# Altium PCB SiLPA_HE.PcbDoc (part 10 of 10)
Units mm, origin at the board's own origin, x right, y up, seen from the top; angles counter-clockwise.
Board outline 222.47 x 100.01 mm, 4 copper layers (Top Layer, Int1 (GND), Int2 (PWR), Bottom Layer), stack 1.508 mm thick; 661 components, 355 nets, 1925 pads, 1744 vias.
Unrouted connection lines stored in the file: 360.
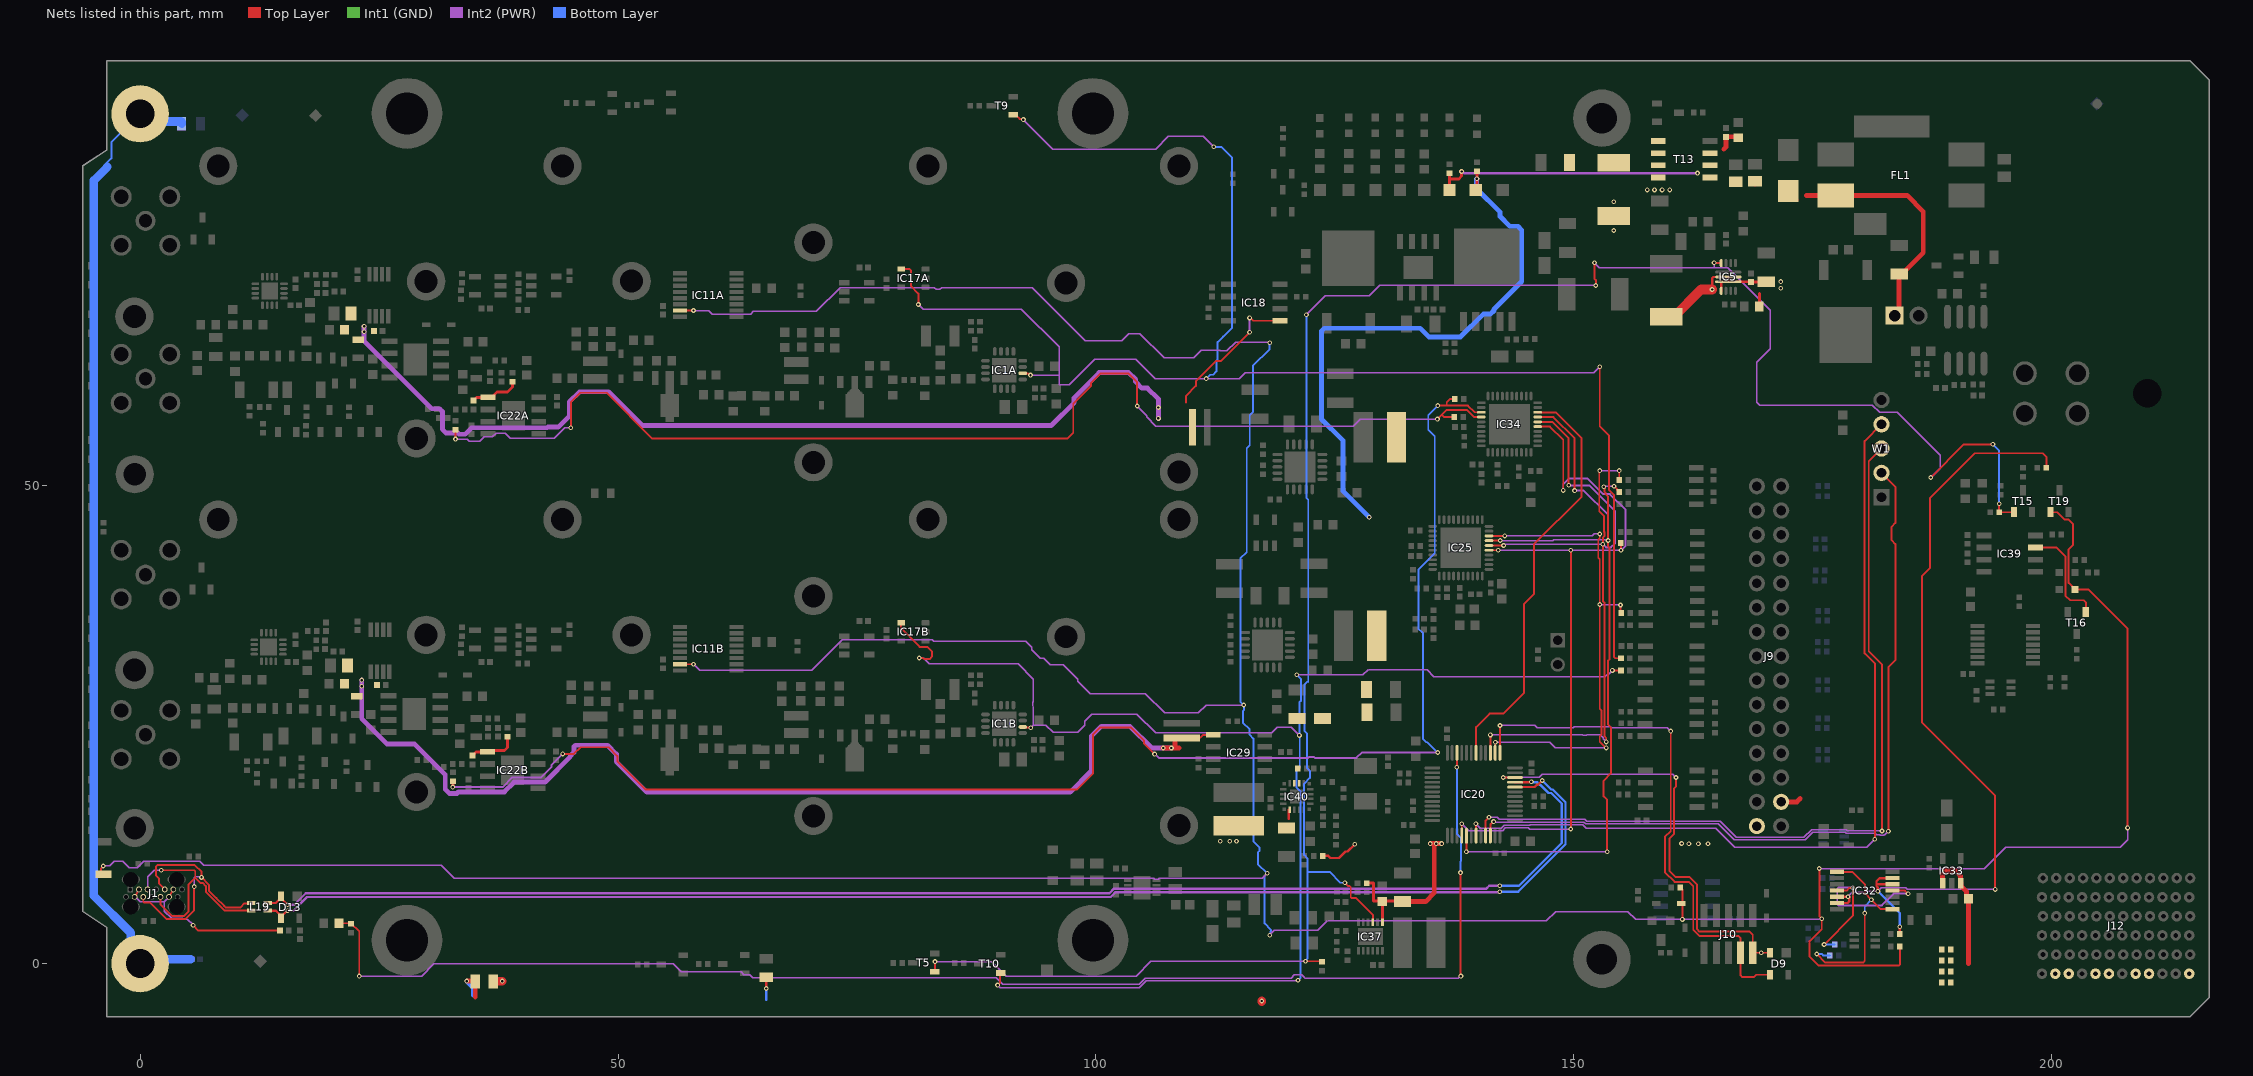
[diagram p9: the nets of this part, all layers, seen from the top]

## Via types
v1: diameter 0.5, hole 0.25, Top Layer to Bottom Layer, tented both sides, 1439 vias
v2: diameter 0.5, hole 0.25, Top Layer to Bottom Layer, tented bottom, 291 vias
v3: diameter 0.5, hole 0.25, Top Layer to Bottom Layer, 12 vias
v4: diameter 0.5, hole 0.25, Top Layer to Bottom Layer, tented top, 2 vias

## Nets (pads, with @x,y where several pads share a name; then routed paths per layer and width w, separated by ;. In a path a pad name is that pad's centre, name@x,y a point inside that pad or via, vN(x,y) a via of type N, cw(c..) or ccw(c..) an arc to the next point about the centre after c; other vN are vias at no path point) (continued)
P12V0: C21.2 C22.2 C99.2 C114.2 D4.1 FL1.2 J9.28 J9.29 J11.1 R41.1 R48.1 R49.1 R50.1 R51.2 R218.1 T13.1 T13.2 T13.3 TP18.1 | length 62.2
  Top Layer w0.3: TP18.1@136.977,80.943 136.977,82.095 ; R218.1@136.977,82.673 136.977,82.095 ; v1(138.252,82.868) 138.252,82.385 137.961,82.095 136.977,82.095
  Top Layer w0.508: v1@138.227,82.868 v1(138.252,82.868) ; 165.677,85.193 165.927,85.443 C99.2@165.927,86.493 166.877,86.493 R51.2@166.927,86.443 ; C22.2@166.927,81.793 C22.2@167.177,81.543 ; C21.2@168.927,81.543 C21.2@168.927,81.843 ; D4.1@171.606,81.331 172.396,80.541 172.396,80.059 D4.1@173.177,80.059 ; J9.28@172.074,16.921 173.33,16.921 173.677,17.268 ; D4.1@172.427,80.809 D4.1@173.177,80.059 ; D4.1@173.248,79.913 173.177,79.984 D4.1@173.177,80.059 ; 174.34,80.359 FL1.2@176.818,80.359 ; FL1.2@176.518,80.059 FL1.2@176.727,80.268 ; FL1.2@177.052,80.268 FL1.2@176.727,80.268 ; J11.1@183.702,67.893 184.027,68.218 C114.2@184.027,72.118 ; C114.2@184.402,72.168 184.673,72.439 184.673,72.489 186.552,74.368 186.552,78.668 184.861,80.359 FL1.2@177.377,80.359 FL1.2@176.818,80.359 ; FL1.2@176.727,80.268 FL1.2@176.818,80.359
  Int2 (PWR) w0.245: v1(138.252,82.868) 138.321,82.868 138.496,82.693 v1(162.927,82.693)
P12V0_DIOT: C101.2 IC33.1 IC33.3 J12.A1 J12.D1 J12.E1 J12.G1 J12.H1 J12.J1 J12.K1 R41.2 R48.2 R49.2 R50.2 | length 12.5
  Top Layer w0.508: IC33.1@188.577,8.393 188.577,9.395 188.875,9.693 189.927,9.693 190.177,9.443 190.427,9.193 IC33.3@190.427,8.443 ; IC33.3@190.477,8.393 190.477,8.143 191.056,7.564 191.056,7.039 191.152,6.943 C101.2@191.177,6.943 ; 191.277,-0.007 C101.2@191.277,6.793
P12V0_SW: C37.2 C123.2 C124.2 C141.2 IC37.1 IC40.13 L8.1 L21.1 R104.1 R159.1 T13.5 T13.6 T13.7 T13.8 | length 23.7
  Top Layer w0.245: L21.1@114.84,14.441 L21.1@114.985,14.297 ; 120.164,15.159 IC40.13@120.164,16.104
  Top Layer w0.254: R159.1@123.644,11.269 124.302,11.269 124.53,11.041 125.409,11.041 126.091,11.723 126.317,11.723 v1(127.066,12.472)
  Top Layer w0.3: R104.1@128.315,8.364 128.24,8.438 129.024,8.438 129.024,6.538 C124.2@129.874,6.538 ; C124.2@129.584,6.829 C124.2@129.874,6.538 ; IC37.1@129.961,4.329 C124.2@129.961,6.513 ; C123.2@131.967,6.538 C124.2@129.874,6.538
  Top Layer w0.5: C123.2@132.053,6.486 134.487,6.486 135.388,7.387 v1@135.388,12.549 ; v1(134.962,12.549) v1(135.6,12.549) v1(136.161,12.549)
  other v1: 162.027,12.543 163.027,12.543 164.027,12.543 161.263,12.557 112.99,12.807 113.987,12.807 114.698,12.807 157.677,80.938 158.427,80.943 159.227,80.943 160.027,80.943
P12V0F: C38.2 C95.2 IC5.1 IC5.8 L8.2 R17.2 | length 6.3
  Top Layer w0.245: L8.2@154.152,78.193 L8.2@154.177,78.218 ; IC5.8@165.406,70.383 165.406,71.172 IC5.1@165.427,71.193
  Top Layer w0.3: IC5.1@166.156,71.333 168.487,71.333 C95.2@168.527,71.293 C95.2@168.567,71.333 ; C95.2@168.627,71.293 170.078,71.293 C38.2@170.116,71.33 C38.2@169.995,71.21 ; R17.2@169.405,68.743 169.405,70.102
  other v1: 171.627,70.643 171.627,71.343 154.177,76.693 154.177,79.693
P25V0_0: C46A.2 C47A.2 C48A.2 IC18.1 L12A.2 R173.2 | length 115.5
  Top Layer w0.2: 109.427,58.683 109.427,59.398 110.46,60.431 110.46,60.935 112.554,63.029 113.058,63.029 v1(116.075,66.046) ; v1(116.075,67.551) 116.156,67.551 116.458,67.249 IC18.1@119.252,67.249
  Top Layer w0.245: C46A.2@21.179,66.334 C46A.2@21.32,66.475 ; L12A.2@22.983,65.367 L12A.2@23.089,65.261
  Top Layer w0.3: C46A.2@21.179,66.334 C46A.2@21.198,66.314
  Int2 (PWR) w0.2: v1(116.075,66.046) v1(116.075,67.551)
  Int2 (PWR) w0.5: v1(23.433,66.685) v1(23.433,66.093) 23.433,65.11 30.5,58.042 31.329,58.042 31.621,57.749 31.621,55.891 32.015,55.497 33.249,55.497 33.365,55.382 34,55.382 34.673,56.054 42.566,56.054 42.635,56.123 43.752,56.123 44.202,56.574 44.235,56.574 44.914,57.253 44.914,58.754 45.974,59.814 49.012,59.814 52.535,56.291 95.328,56.291 97.704,58.667 97.704,59.201 100.327,61.824 103.421,61.824 104.137,61.108 104.137,60.876 104.802,60.212 105.385,60.212 106.528,59.068 v1(106.528,58.171) v1(106.528,57.032)
  Int1 (GND) w0.2: v1@116.075,66.017 v1(116.075,66.046)
P25V0_1: C46B.2 C47B.2 C48B.2 IC29.1 L12B.2 R179.2 | length 110.9
  Top Layer w0.2: R179.2@108.96,23.596 R179.2@110.51,23.596 ; R179.2@110.077,23.43 110.233,23.43 110.423,23.621 110.466,23.663 110.956,23.663 111.218,23.925 112.127,23.925 IC29.1@112.176,23.973
  Top Layer w0.5: v1@106.984,22.558 v1(107.033,22.558) v1(107.888,22.558) 108.281,22.558 ; 108.673,22.558 108.281,22.558 ; R179.2@108.96,23.596 108.381,23.596 108.281,23.496 108.281,22.558
  Int2 (PWR) w0.5: 99.523,20.166 99.523,23.801 100.547,24.825 103.556,24.825 105.824,22.558 v1(107.033,22.558) v1(107.888,22.558)
  Int2 (PWR) w0.508: v1(23.189,29.652) v1(23.189,29.007) 23.189,25.617 25.847,22.959 28.729,22.959 31.922,19.766 31.922,18.228 32.343,17.807 33.136,17.807 33.288,17.959 38.104,17.959 39.133,18.988 42.358,18.988 45.004,21.633 45.004,21.712 45.385,22.093 45.385,22.646 ; 45.385,22.705 45.527,22.847 48.899,22.847 49.831,21.915 49.831,21.108 52.996,17.943 97.3,17.943 99.523,20.166
P26V0_SW: C137.2 C138.2 C139.2 C140.2 IC40.6 IC40.7 L11.1 L22.1 R107.1 R135.2 TP2.1 | length 60.7
  Top Layer w0.3: TP2.1@139.731,80.943 139.85,81.062 v1(139.85,82.111) 139.855,82.115 139.855,82.907 R107.1@139.859,82.911
  Bottom Layer w0.508: v1(128.591,46.69) 125.825,49.455 125.825,54.731 123.586,56.97 123.586,66.167 123.884,66.465 133.914,66.465 134.818,65.562 138.134,65.562 140.524,67.952 141.267,67.952 141.636,68.322 141.636,68.442 144.549,71.354 144.549,76.731 144.149,77.131 143.297,77.131 142.275,78.153 142.275,78.614 139.803,81.086 139.803,82.064 v1(139.85,82.111)
PGOOD: IC5.7 IC37.3 R22.1 R65.1 T5.1 T15.1 | length 228.4
  Top Layer w0.2: T5.1@83.127,-0.857 83.161,-0.823 v1(83.161,0.206) ; v1(121.915,0.243) 123.359,0.243 R65.1@123.474,0.128 ; v1(126.044,8.453) 126.39,8.107 126.539,8.107 126.656,7.99 126.656,6.962 126.773,6.845 127.215,6.845 128.961,5.099 IC37.3@128.961,4.329 ; v1(152.152,73.318) 152.152,71.635 152.289,71.498 152.289,70.95 v1(152.296,70.943) ; v1(164.661,73.321) 164.68,73.302 165.386,73.302 IC5.7@165.406,73.283 ; v1(187.331,50.847) 190.804,54.319 v1(193.833,54.319) ; v1(194.49,48.115) 194.49,47.234 R22.1@194.475,47.218 T15.1@196.036,47.218
  Int2 (PWR) w0.15: v1(83.161,0.206) 89.077,0.206 90.59,-1.307 104.19,-1.307 105.715,0.218 v1@122.002,0.218 ; v1(122.009,67.871) 123.982,69.843 128.591,69.843 129.691,70.943 v1(152.296,70.943) ; v1(152.152,73.318) 152.663,72.807 166.086,72.807 170.552,68.342 170.552,64.332 169.141,62.922 169.141,58.729 169.451,58.419 181.228,58.419 181.982,57.665 183.819,57.665 188.304,53.18 188.304,51.819 v1(187.331,50.847) ; 164.661,72.812 v1(164.661,73.321)
  Bottom Layer w0.2: v1(121.915,0.243) 121.915,0.3 122.121,0.506 122.121,9.581 ; v1(122.009,67.871) 122.009,48.722 122.208,48.524 122.208,29.457 ; 122.121,29.482 121.798,29.159 121.798,24.347 122.062,24.083 122.062,20.471 122.383,20.151 122.383,19.423 121.768,18.808 121.768,11.37 122.121,11.017 122.121,9.581 ; v1(126.044,8.453) v1(126.044,8.453) 125.569,8.454 124.442,9.581 122.121,9.581 ; v1(193.833,54.319) 194.49,53.661 v1(194.49,48.115)
RFSW_DIS0: IC1A.2 IC17A.4 R42.1 T9.1 | length 170.4
  Top Layer w0.2: IC17A.4@79.617,72.652 80.494,72.652 80.631,72.515 80.631,70.894 81.427,70.098 v1(81.427,68.954) ; T9.1@91.368,88.793 91.568,88.793 92.001,88.36 92.341,88.36 v1(92.407,88.293) ; IC1A.2@92.339,61.764 92.386,61.716 92.91,61.716 93.058,61.568 v1(93.152,61.568) ; v1(152.705,62.443) 152.705,56.209 153.677,55.237 153.677,49.529 154.194,49.012 154.194,32.061 154.311,31.944 R42.1@154.924,31.944
  Int2 (PWR) w0.15: v1(81.427,68.954) 81.908,68.473 92.166,68.473 96.134,64.505 96.134,61.568 ; v1(92.407,88.293) 95.494,85.206 106.257,85.206 107.581,86.53 111.233,86.53 v1(112.319,85.443) ; v1(93.152,61.568) 96.134,61.568 ; v1(152.705,62.443) 152.078,61.816 115.63,61.816 115.013,61.199 v1(111.542,61.199) 111.533,61.189 106.18,61.189 104.168,63.201 100.14,63.201 99.85,63.201 97.185,60.536 96.223,60.536 96.134,60.625 96.134,61.568
  Bottom Layer w0.2: v1(111.542,61.199) 111.948,61.604 112.252,61.604 112.599,61.952 112.599,63.065 112.734,63.2 112.734,65.023 113.305,65.594 113.315,65.594 114.243,66.522 114.243,84.314 113.115,85.443 v1(112.319,85.443)
RFSW_DIS1: IC1B.2 IC17B.4 R43.1 T10.1 | length 157
  Top Layer w0.2: IC17B.4@79.617,35.652 79.617,35.064 81.549,33.132 82.372,33.132 82.844,32.66 82.844,32.11 82.595,31.861 82.034,31.861 81.927,31.968 v1(81.512,31.968) ; v1(89.711,-2.253) 89.711,-2.236 89.962,-1.986 89.962,-1.039 T10.1@90.019,-0.981 ; IC1B.2@92.339,24.764 92.386,24.716 93.129,24.716 v1(93.177,24.668) ; v1(154.025,30.674) R43.1@154.924,30.674
  Int2 (PWR) w0.15: v1(81.512,31.968) 81.542,31.938 81.991,31.938 82.541,31.388 91.845,31.388 93.463,29.77 93.463,27.411 93.378,27.325 93.378,26.951 93.463,26.865 93.463,24.954 ; v1(89.711,-2.253) 89.976,-2.518 104.553,-2.518 105.28,-1.79 v1@121.197,-1.79 ; v1(93.177,24.668) 93.463,24.954 ; v1(121.007,30.218) 127.933,30.218 128.463,30.749 ; v1@121.11,-1.765 v1(121.14,-1.735) ; v1(121.279,23.873) 120.451,24.701 118.986,24.701 118.412,24.127 106.235,24.127 104.262,26.1 99.578,26.1 98.817,25.34 98.817,24.909 98.104,24.196 95.507,24.196 94.749,24.954 93.463,24.954 ; 128.55,30.723 134.639,30.723 135.34,30.022 153.25,30.022 153.571,30.343 153.679,30.343 154.01,30.674 v1(154.025,30.674)
  Bottom Layer w0.2: v1(121.007,30.218) 121.446,29.779 121.446,27.485 121.279,27.317 v1(121.279,23.873) 121.316,23.836 121.316,20.492 120.993,20.169 120.993,18.392 121.416,17.968 121.416,17.331 121.4,17.315 121.4,-1.468 121.14,-1.727 v1(121.14,-1.735)
RST: IC39.3 T16.1 | length 11
  Top Layer w0.2: IC39.3@198.291,43.521 200.514,43.521 201.425,42.611 201.425,38.503 201.919,38.009 203.318,38.009 203.552,37.775 T16.1@203.552,36.791
RST_N: D1.1 D17.2 IC11A.15 IC11B.15 R93.2 R133.1 SW1.1 T19.1 | length 478.8
  Top Layer w0.2: SW1.1@-4.073,9.363 -4.073,9.963 -3.848,10.188 v1(-3.848,10.213) ; IC11B.15@56.477,31.318 v1(57.896,31.318) ; IC11A.15@56.477,68.318 v1(57.896,68.318) ; R93.2@161.152,7.893 161.201,7.893 161.352,7.742 v1(161.352,4.618) ; v1(175.677,9.943) 175.677,4.96 175.927,4.71 175.927,3.605 174.665,2.343 174.665,0.733 175.615,-0.217 183.992,-0.217 184.109,-0.1 R133.1@184.109,1.793 ; T19.1@199.852,47.218 200.555,47.218 201.33,46.443 201.764,46.443 202.229,45.978 202.229,45.504 202.205,45.48 202.205,43.783 201.752,43.33 201.752,39.827 202.124,39.455 202.124,39.429 202.403,39.15 D1.1@202.429,39.15 203.8,39.15 207.927,35.023 v1(207.927,14.193)
  Int2 (PWR) w0.15: v1(-3.848,10.213) -3.164,10.213 -2.686,10.691 -1.822,10.691 -1.147,10.016 -0.311,10.016 0.367,10.694 6.243,10.694 6.661,10.276 31.496,10.276 32.854,8.918 106.022,8.918 106.138,8.801 106.513,8.801 106.629,8.918 117.496,8.918 ; v1(57.896,31.318) 58.547,30.667 70.276,30.667 73.471,33.862 82.884,33.862 83.041,33.705 92.658,33.705 93.286,33.077 93.286,32.836 94.176,31.946 94.561,31.946 95.228,31.279 96.586,31.279 98.115,29.751 98.115,29.554 99.419,28.25 105.165,28.25 107.185,26.23 110.713,26.23 111.529,27.046 v1(115.468,27.046) ; v1(57.896,68.318) 59.505,68.318 59.88,67.943 63.864,67.943 64.168,68.246 70.758,68.246 73.238,70.726 83.102,70.726 83.286,70.542 83.66,70.542 83.844,70.726 93.316,70.726 98.883,65.158 102.676,65.158 103.427,65.909 104.583,65.909 107.132,63.36 110.222,63.36 111.037,64.175 112.933,64.175 112.979,64.129 113.702,64.129 114.599,65.026 117.999,65.026 118.082,64.943 v1(118.177,64.943) ; 117.409,8.943 v1(117.911,9.445) ; v1(118.19,2.968) 118.19,3.037 118.626,3.473 123.183,3.473 124.192,4.481 ; 124.279,4.456 147.115,4.456 148.102,5.443 155.644,5.443 156.47,4.618 v1(161.352,4.618) 161.389,4.656 175.89,4.656 v1(175.927,4.693) ; v1(175.677,9.943) 192.927,9.943 195.152,12.168 207.152,12.168 207.927,12.943 v1(207.927,14.193)
  Bottom Layer w0.2: v1(115.468,27.046) 115.118,27.397 115.118,42.395 115.775,43.053 115.775,53.893 116.082,54.2 116.082,57.358 116.409,57.685 116.409,62.524 118.163,64.278 118.163,64.929 v1(118.177,64.943) v1@118.227,64.893 ; v1@115.468,27.121 115.468,26.501 115.363,26.396 115.363,25.209 116.061,24.511 116.061,23.95 116.467,23.544 116.467,12.791 117.092,12.166 117.092,11.771 116.948,11.626 116.948,10.408 v1(117.911,9.445) 117.639,9.173 117.639,4.198 118.298,3.539 118.298,3.387 118.257,3.346 118.257,3.035 v1(118.19,2.968)
SERVMOD_3V3: IC32.5 IC32.6 IC32.12 IC32.13 R53.2 R138.1 | length 88.9
  Top Layer w0.2: v1@194.124,7.762 194.068,7.818 194.068,17.562 186.436,25.194 186.436,40.562 187.237,41.363 187.237,48.671 191.951,53.385 198.036,53.385 199.066,53.385 199.427,53.024 R53.2@199.427,51.873
  Top Layer w0.245: IC32.6@177.527,6.343 178.633,6.343 178.796,6.506 178.796,6.993 IC32.5@177.527,6.993 ; v1(181.802,7.566) 181.799,7.569 181.799,7.946 181.655,8.09 181.655,8.293 ; IC32.12@183.327,8.293 181.655,8.293 ; IC32.13@183.327,8.943 181.992,8.943 181.655,8.607 181.655,8.293 ; R138.1@184.089,3.093 v1(184.089,3.861) ; v1(194.068,7.762) v1@194.124,7.762
  Int2 (PWR) w0.15: v1(178.673,6.993) 179.122,7.442 180.353,7.442 180.477,7.566 v1(181.802,7.566) 182.157,7.921 184.701,7.921 184.861,7.762 v1(194.068,7.762)
  Int1 (GND) w0.245: v1(184.089,3.861) v1@184.109,3.841
  Bottom Layer w0.245: v1(181.802,7.566) 184.089,5.279 v1(184.089,3.861)
SPI1_MISO: IC20.16 IC25.5 IC34.5 R16.1 | length 78.5
  Top Layer w0.2: IC20.16@138.263,13.393 v1(138.263,14.618) ; IC25.5@141.117,43.243 v1(142.085,43.243) ; IC34.5@146.211,56.174 147.485,56.174 148.883,54.775 v1(148.883,49.506) ; v1(149.674,14.075) v1(149.674,43.243) ; R16.1@154.916,43.983 154.931,43.969 v1(154.931,43.243)
  Int2 (PWR) w0.15: v1(138.263,14.618) 138.979,13.902 142.533,13.902 142.827,14.196 145.235,14.196 145.356,14.075 v1(149.674,14.075) ; v1(142.085,43.243) v1(149.674,43.243) v1(154.931,43.243)
  Int2 (PWR) w0.2: v1(148.883,49.506) 148.883,50.143 149.494,50.754 151.404,50.754 153.043,49.116 153.762,49.116 155.401,47.477 155.401,43.714 v1(154.931,43.243)
SPI1_MOSI: IC20.17 IC25.7 IC34.7 R35.1 | length 87.3
  Top Layer w0.2: v1(138.753,11.702) 138.758,11.707 138.758,13.388 IC20.17@138.763,13.393 ; IC25.7@141.117,44.243 141.126,44.252 142.279,44.252 v1(142.288,44.261) ; IC34.7@146.211,57.174 147.843,57.174 150.069,54.948 v1(150.069,49.483) ; v1(153.129,49.894) 153.186,49.836 153.186,49.369 153.311,49.244 153.311,49.101 153.572,48.84 v1@153.572,44.175 ; v1(153.478,11.702) 153.478,17.116 153.095,17.499 153.095,19.126 153.861,19.892 153.861,24.728 153.548,25.04 153.548,31.662 153.727,31.84 153.727,43.471 153.572,43.626 v1(153.572,44.256) ; v1(154.194,49.941) 154.528,49.608 154.528,49.542 R35.1@154.741,49.328
  Int2 (PWR) w0.15: v1(138.753,11.702) v1(153.478,11.702) ; v1(142.288,44.261) 142.293,44.256 147.796,44.256 147.871,44.331 v1@153.403,44.331 ; v1(153.129,49.894) 153.153,49.918 154.17,49.918 v1(154.194,49.941)
  Int2 (PWR) w0.2: v1(150.069,49.483) 151.018,49.483 153.572,46.929 v1(153.572,44.256)
SPI1_NCS2: IC20.42 IC34.8 | length 44
  Top Layer w0.2: IC20.42@139.763,22.043 139.763,24.734 141.188,26.159 142.625,26.159 144.767,28.301 144.767,37.598 145.807,38.638 145.807,43.871 150.795,48.859 150.795,54.981 148.121,57.655 146.23,57.655 IC34.8@146.211,57.674
SPI1_NSS: IC20.38 IC25.8 R39.1 | length 50.6
  Top Layer w0.2: IC25.8@141.117,44.743 v1(142.761,44.743) ; IC20.38@141.763,22.043 141.774,22.054 141.774,23.142 v1(141.786,23.153) ; v1(152.705,44.943) 152.7,44.938 152.7,44.478 152.55,44.328 152.55,42.435 152.7,42.285 152.7,37.569 v1(152.705,37.564) 152.705,26.666 152.883,26.488 152.883,23.96 152.705,23.782 152.705,23.198 153.336,22.567 v1@153.371,22.567 ; v1(154.875,37.509) 154.875,36.73 R39.1@154.935,36.67 R39.1@154.931,36.665
  Int2 (PWR) w0.15: v1(141.786,23.153) 147.477,23.153 148.064,22.567 v1(153.384,22.567) ; v1(142.761,44.743) 151.942,44.743 152.142,44.943 v1(152.705,44.943) ; v1(152.705,37.564) 152.732,37.536 154.848,37.536 v1(154.875,37.509)
SPI1_SCK: IC20.39 IC25.6 IC34.6 R37.1 | length 78
  Top Layer w0.2: IC25.6@141.117,43.743 v1(142.641,43.743) ; v1(141.261,23.923) 141.262,23.922 IC20.39@141.262,22.044 ; IC34.6@146.211,56.674 147.709,56.674 149.449,54.934 v1(149.449,50.034) ; v1(152.705,51.576) 152.652,51.522 152.652,47.302 153.158,46.795 153.158,45.164 153.182,45.141 153.182,44.725 153.027,44.57 153.027,37.916 153.182,37.761 153.182,26.652 153.21,26.623 153.21,23.763 153.384,23.59 v1(153.384,23.194) ; R37.1@154.741,50.598 v1(154.741,51.576) ; IC20.39@141.262,22.044 IC20.39@141.263,22.043
  Int2 (PWR) w0.15: v1(141.261,23.923) 150.921,23.923 150.949,23.895 151.323,23.895 151.351,23.923 152.781,23.923 153.063,23.641 153.063,23.545 153.384,23.224 v1(153.384,23.194) ; v1(142.641,43.743) 142.776,43.878 v1(153.027,43.878) ; v1(152.705,51.576) v1(154.741,51.576)
  Int2 (PWR) w0.2: v1(149.449,50.034) 151.605,50.034 154.309,47.33 154.309,43.991 153.863,43.545 153.36,43.545 v1(153.027,43.878)
STRIP1: C132.1 M1.1 M4.1 R175.1 R178.2 | length 106.6
  Top Layer w0.5: v1(34.163,-1.829) 35.019,-1.829 35.052,-1.862 35.052,-3.506
  Bottom Layer w0.2: -3.79,83.443 -2.998,84.235 -2.998,85.902 -0.693,88.207 M1.1@0,88.9
  Bottom Layer w0.5: v1(34.163,-1.829) 34.849,-2.515 34.849,-3.302
  Bottom Layer w0.9: -3.423,83.343 -4.835,81.931 -4.835,64.743 -4.835,7.078 -0.976,3.219 M4.1@-0.976,0.975 ; M1.1@-0.692,88.207 M1.1@0,88.9 0.8,88.1 4.323,88.1 4.348,88.075 R175.1@4.348,87.85 ; M4.1@0.45,0.45 C132.1@5.298,0.45
STRIP2: R177.1 | length 2.4
  Top Layer w0.3: v1(65.497,-2.604) 65.507,-2.594 R177.1@65.507,-1.408
  Bottom Layer w0.3: v1(65.497,-2.604) 65.507,-2.614 65.507,-3.76
STRIP3: R178.1 | length 1
  Top Layer w0.9: R178.1@36.948,-1.8 36.977,-1.829 v1(37.897,-1.829) ; v1@117.337,-3.988 v1(117.337,-3.912)
Sw_7V5: IC5.2 L9.1 | length 8.9
  Top Layer w0.245: v1(164.455,70.52) 164.455,71.689 164.599,71.833 IC5.2@166.156,71.833
  Top Layer w1: L9.1@159.677,67.668 160.452,67.668 163.304,70.52 v1(164.455,70.52)
SWCLK: D9.3 IC20.37 J10.4 | length 56.7
  Top Layer w0.2: IC20.37@142.263,22.043 v1(142.263,24.909) ; v1(160.127,24.318) 160.127,13.853 159.522,13.248 159.522,9.548 160.527,8.543 162.002,8.543 162.354,8.191 162.481,8.064 162.481,3.545 163.135,2.891 167.204,2.891 167.437,2.658 J10.4@167.437,1.132 167.437,-1.242 167.614,-1.419 168.826,-1.419 169.076,-1.168 D9.3@170.512,-1.168
  Int2 (PWR) w0.15: v1(142.263,24.909) 145.924,24.909 146.147,24.686 149.928,24.686 150.042,24.8 153.822,24.8 153.936,24.686 159.759,24.686 v1(160.127,24.318)
SWDIO: D9.2 IC20.34 J10.2 | length 47.5
  Top Layer w0.2: v1(142.613,19.468) IC20.34@143.838,19.468 ; 160.005,12.93 160.005,9.672 160.61,9.068 162.077,9.068 162.894,8.251 162.894,3.594 163.134,3.354 168.392,3.354 168.707,3.039 J10.2@168.707,1.132 v1(169.609,1.132) D9.2@170.512,1.132 ; 160.005,12.931 160.005,13.096 160.482,13.574 160.482,18.326 160.677,18.521 v1(160.677,19.461)
  Int2 (PWR) w0.15: v1(142.613,19.468) 146.359,19.468 146.684,19.793 160.331,19.793 160.662,19.461 v1(160.677,19.461)
Switch_I2C.SCL: IC32.1 IC32.8 R40.2 | length 21.6
  Top Layer w0.2: v1(175.396,1.004) 176.29,0.11 180.261,0.11 180.427,0.276 v1(180.427,5.284) ; IC32.1@177.527,9.593 179.133,9.593 180.457,8.269 180.457,7.334 v1(181.124,6.666) 182.097,5.693 IC32.8@183.327,5.693
  Bottom Layer w0.2: v1(175.396,1.004) 175.927,1.004 176.074,0.857 R40.2@176.784,0.857 ; v1(180.427,5.284) 180.427,5.969 v1(181.124,6.666)
Switch_I2C.SDA: IC32.4 IC32.11 R6.2 | length 23.1
  Top Layer w0.2: v1(176.17,1.993) 179.177,5 v1(179.177,7.943) 179.161,7.927 178.809,7.927 178.525,7.643 IC32.4@177.527,7.643 ; IC32.11@183.327,7.643 184.629,7.643 v1(184.962,7.31)
  Int2 (PWR) w0.2: v1(179.177,7.943) 177.669,7.943 177.552,7.826 177.552,6.202 177.669,6.085 182.213,6.085 183.438,7.31 v1(184.962,7.31)
  Bottom Layer w0.2: v1(176.17,1.993) R6.2@177.266,1.993
USART3_DE: IC20.19 W1.4 | length 89.2
  Top Layer w0.2: v1(139.748,14.618) 139.756,14.611 139.756,13.4 IC20.19@139.763,13.393 ; v1(181.477,13.018) 181.477,31.393 180.418,32.452 180.418,54.659 W1.4@182.177,56.418
  Int2 (PWR) w0.15: v1(139.748,14.618) 140.185,14.181 142.417,14.181 142.711,14.476 145.361,14.476 145.414,14.529 150.923,14.529 151.271,14.181 164.816,14.181 166.829,12.168 180.627,12.168 v1(181.477,13.018)
USART3_RX: IC20.22 W1.2 | length 83.1
  Top Layer w0.2: IC20.22@141.263,13.393 141.282,13.412 141.282,14.583 141.549,14.85 v1(141.601,14.85) ; W1.2@182.177,51.338 183.627,49.888 183.627,46.093 183.225,45.691 183.225,44.295 183.627,43.893 183.627,31.737 182.902,31.012 v1(182.902,13.843)
  Int2 (PWR) w0.15: v1(141.601,14.85) 141.643,14.808 151.039,14.808 151.243,14.604 165.091,14.604 166.756,12.939 174.185,12.939 174.993,13.746 178.396,13.746 178.504,13.639 181.497,13.639 181.671,13.465 181.998,13.465 182.044,13.419 182.419,13.419 182.465,13.465 182.524,13.465 v1(182.902,13.843)
USART3_TX: IC20.21 W1.3 | length 85.6
  Top Layer w0.2: IC20.21@140.763,13.393 140.763,14.951 v1(141.114,15.302) ; W1.3@182.177,53.878 180.844,52.545 180.844,32.675 182.232,31.288 v1(182.232,13.873)
  Int2 (PWR) w0.15: v1(141.114,15.302) 141.982,15.302 142.199,15.085 151.157,15.085 151.359,14.883 165.312,14.883 166.977,13.218 174.07,13.218 174.877,14.026 178.512,14.026 178.62,13.918 182.186,13.918 v1(182.232,13.873)
USB_D_R_N: J1.A5 J1.B5 L19.1 | length 23.2
  Top Layer w0.2: J1.B5@2.127,6.978 2.127,6.19 2.65,5.667 2.65,5.658 3.047,5.261 3.056,5.261 3.329,4.988 4.608,4.988 5.05,5.43 5.05,8.241 5.766,8.957 ; v1(2.217,9.767) 5.649,9.767 5.766,9.649 5.766,8.957 ; L19.1@11.643,5.538 8.834,5.538 8.658,5.714 6.875,7.497 6.875,8.107 6.55,8.433 6.3,8.433 5.776,8.957 5.766,8.957
  Int2 (PWR) w0.15: J1.A5@0.777,7.758 0.777,9.067 1.477,9.767 v1(2.217,9.767)
USB_D_R_P: J1.A7 J1.B7 L19.4 | length 26.7
  Top Layer w0.2: J1.B7@0.327,6.978 0.327,6.474 0.415,6.386 1.04,6.386 2.776,4.651 4.733,4.651 5.657,5.575 v1(5.657,8.056) ; J1.A7@2.577,7.758 1.979,8.356 1.979,8.894 1.677,9.196 1.677,10.177 1.794,10.294 5.721,10.294 6.427,9.588 v1(6.427,9.018) 7.155,8.29 7.202,8.243 7.202,7.632 7.976,6.858 8.794,6.041 8.969,5.865 10.451,5.865 10.514,5.881 10.92,6.286 11.293,6.286 L19.4@11.643,6.338
  Int2 (PWR) w0.15: v1(5.657,8.056) 5.657,8.968 5.791,9.102 6.343,9.102 v1(6.427,9.018)
USB_N: D13.3 IC20.32 L19.2 | length 150.1
  Top Layer w0.245: L19.2@13.343,5.538 14.193,5.538 14.573,5.159 14.573,5.102 14.687,4.988 14.813,4.988 15.301,5.476 15.376,5.476 v4(15.425,5.525) ; IC20.32@143.838,18.468 145.88,18.468 146.104,18.692 146.223,18.692 v1(146.687,19.156)
  Int2 (PWR) w0.245: v4(15.425,5.525) 16.021,5.525 17.465,6.969 19.93,6.969 101.538,6.969 102.027,7.458 142.014,7.458 142.025,7.469 142.199,7.469 v1(142.246,7.516)
  Bottom Layer w0.245: v1(142.246,7.516) 144.159,7.516 149.125,12.482 149.125,16.869 147.777,18.218 147.625,18.218 v1(146.687,19.156)
USB_P: D13.2 IC20.33 L19.3 | length 148.7
  Top Layer w0.245: L19.3@13.343,6.338 13.671,6.34 14.194,6.34 D13.2@14.681,6.826 ; D13.2@14.75,7.025 14.75,6.825 15.418,6.157 v4(15.425,6.157) ; IC20.33@143.838,18.968 145.504,18.968 v1(145.552,19.016)
  Int2 (PWR) w0.245: v4(15.425,6.157) 15.434,6.148 16.12,6.148 17.323,7.35 19.777,7.35 100.961,7.35 100.97,7.341 101.384,7.341 101.882,7.839 140.848,7.839 141.152,8.143 v1(142.246,8.143)
  Bottom Layer w0.245: v1(142.246,8.143) 144.247,8.143 148.744,12.64 148.744,16.724 147.623,17.846 147.355,17.846 146.513,18.688 146.449,18.688 146.169,18.967 145.601,18.967 v1(145.552,19.016)
USB_VBUS: FB4.2 J1.A4 J1.A9 J1.B4 J1.B9 | length 20
  Top Layer w0.2: J1.B9@-0.573,6.978 J1.A4@-0.123,7.758 ; J1.A4@-0.149,7.682 J1.A4@-0.073,7.758 ; J1.B4@3.027,6.978 J1.A9@3.477,7.758 ; J1.A9@3.451,7.682 J1.A9@3.527,7.758 ; v1(5.545,4.006) 6.091,3.46 FB4.2@14.636,3.46
  Int2 (PWR) w0.15: J1.B9@-0.523,6.978 0.002,6.453 2.552,6.453 ; J1.B4@3.077,6.978 2.552,6.453 ; v1(5.545,4.006) 5.545,4.067 4.958,4.654 4.517,4.654 4.44,4.73 3.285,4.73 2.552,5.463 2.552,6.453
VBIAS_CTRL1: IC34.24 R98.2 R127A.2 | length 125.4
  Top Layer w0.2: v1(32.99,54.872) R127A.2@32.99,55.83 ; v1(45.06,56.065) 45.06,58.722 46.058,59.721 48.807,59.721 53.598,54.929 97.003,54.929 97.625,55.552 97.625,58.553 99.479,60.407 99.479,60.731 100.464,61.716 103.429,61.716 104.307,60.837 v1(104.307,58.327) ; v1(135.717,56.961) 136.189,57.433 ; R98.2@137.491,57.174 136.448,57.174 136.189,57.433 ; IC34.24@140.311,57.174 139.552,57.174 138.82,57.905 136.661,57.905 136.189,57.433
  Int2 (PWR) w0.15: v1(32.99,54.872) 34.199,54.872 34.43,54.642 35.544,54.642 35.997,55.095 36.844,55.095 37.25,55.501 38.184,55.501 38.712,54.973 43.345,54.973 44.437,56.065 v1(45.06,56.065) ; v1(104.307,58.327) 105.32,57.314 105.32,57.183 106.267,56.237 126.935,56.237 127.659,56.961 v1(135.717,56.961)
VBIAS_CTRL2: IC34.23 R99.2 R127B.2 | length 159.1
  Top Layer w0.2: v1(44.205,21.934) 45.389,21.934 46.087,22.632 49.019,22.632 49.942,21.709 49.942,21.163 52.914,18.192 97.994,18.192 99.677,19.875 99.677,23.933 100.444,24.7 103.658,24.7 105.008,23.349 105.008,23.041 v1(106.136,21.913) ; v1(135.747,58.374) 136.695,58.374 ; R99.2@137.557,59.043 137.025,59.043 136.695,58.713 136.695,58.374 ; IC34.23@140.311,57.674 139.617,57.674 138.918,58.374 136.695,58.374
  Top Layer w0.3: v1(32.717,18.465) 32.727,18.475 R127B.2@32.727,18.92
  Int2 (PWR) w0.2: v1(32.717,18.465) 35.214,18.465 37.93,18.465 38.933,19.469 41.947,19.469 43.047,20.569 43.047,20.776 v1(44.205,21.934) ; v1(106.136,21.913) 106.216,21.913 106.635,21.494 122.147,21.494 122.257,21.604 122.803,21.604 122.888,21.52 127.245,21.52 127.832,22.107 ; 127.919,22.082 v1(135.747,22.082)
  Bottom Layer w0.2: v1(135.747,22.082) 134.676,23.152 134.561,23.152 134.19,23.523 134.19,34.598 133.739,35.049 133.739,41.205 135.439,42.904 135.439,55.148 134.761,55.826 134.761,57.387 v1(135.747,58.374)
VbiasA: IC22A.1 R18A.2 R125A.1 | length 5.3
  Top Layer w0.3: R125A.1@34.866,58.908 34.886,58.908 35.026,59.048 35.026,59.06 35.201,59.235 IC22A.1@36.407,59.235 36.882,59.235 37.032,59.385 37.032,59.466 37.354,59.788 38.45,59.788 38.964,60.303 R18A.2@38.964,60.882
VbiasB: IC22B.1 R18B.2 R125B.1 | length 5.1
  Top Layer w0.3: R125B.1@34.789,21.769 34.809,21.769 34.993,21.952 34.993,21.972 35.169,22.148 IC22B.1@36.33,22.148 36.48,22.298 38.119,22.298 38.427,22.606 R18B.2@38.427,23.723
VBUS_DET: IC20.46 R69.1 R70.1 | length 148
  Top Layer w0.2: R69.1@20.811,4.222 R70.1@22.081,4.222 ; R70.1@22.081,4.184 22.101,4.184 22.927,3.358 v1(22.927,-1.307) ; v1(137.75,20.543) 137.756,20.55 137.756,22.036 IC20.46@137.763,22.043 ; v1(138.134,9.514) 138.156,9.492 138.156,-1.286 v1(138.177,-1.307)
  Int2 (PWR) w0.15: v1(22.927,-1.307) 29.439,-1.307 30.714,-0.033 55.79,-0.033 56.626,-0.869 62.88,-0.869 63.159,-1.147 63.756,-1.147 64.09,-1.481 89.578,-1.481 90.236,-2.138 104.541,-2.138 105.166,-1.513 120.435,-1.513 120.756,-1.192 121.525,-1.192 121.766,-1.434 121.846,-1.513 137.914,-1.513 138.12,-1.307 v1(138.177,-1.307)
  Bottom Layer w0.2: v1(137.75,20.543) 137.75,13.594 138.208,13.136 138.208,10.733 138.134,10.659 v1(138.134,9.514)
pads on no net: D5.1 D5.3 D5.5 D11A.1 D11B.1 D15.5 D16.5 FTG1.FTG2 FTG2.1 FTG3.1 FTG4.1 FTG5.1 FTG6.1 IC1A.4 IC1A.6 IC1A.7 IC1A.8 IC1A.13 IC1A.14 IC1A.15 IC1A.16 IC1B.4 IC1B.6 IC1B.7 IC1B.8 IC1B.13 IC1B.14 IC1B.15 IC1B.16 IC4.3 IC4.5 IC4.6 IC7A.1 IC7A.4 IC7A.5 IC7A.8 IC7B.1 IC7B.4 IC7B.5 IC7B.8 IC9A.2 IC9A.3 IC9A.6 IC9A.8 IC9A.12 IC9A.13 IC9A.16 IC9B.2 IC9B.3 IC9B.6 IC9B.8 IC9B.12 IC9B.13 IC9B.16 IC11A.6 IC11A.7 IC11A.9 IC11B.6 IC11B.7 IC11B.9 IC13.3 IC13.4 IC13.6 IC16.5 IC18.4 IC20.2 IC20.31 IC25.9 IC25.10 IC25.15 IC25.16 IC25.17 IC25.20 IC25.21 IC25.27 IC25.28 IC25.29 IC25.40 IC28.1 IC28.4 IC28.5 IC29.4 IC33.4 IC34.1 IC34.2 IC34.3 IC34.4 IC34.9 IC34.10 IC34.11 IC34.12 IC34.13 IC34.14 IC34.15 IC34.16 IC34.17 IC34.20 IC34.21 IC34.27 IC34.28 IC34.29 IC34.30 IC34.31 IC34.40 IC40.18 IC40.19 IC40.20 IC40.21 IC41.4 IC41.5 IC41.6 IC41.8 IC41.9 IC41.10 IC41.11 IC41.12 IC42.4 IC42.5 IC42.6 IC42.8 IC42.9 IC42.10 IC42.11 IC42.12 IC43.7 J7.5 J10.6 J10.7 J10.8 J10.9 J12.A5 J12.B1 J12.B5 J12.D5 J12.E2 J12.E4 J12.E5 J12.F2 J12.F4 J12.G3 J12.H3 J12.H6 J12.I2 J12.I6 J12.J3 J12.K3 J12.L2 LD1.3 LD2.3 LD3.3 LD4.3 LD5.3 LD6.3 LD7.3 LD8.3 LD9.3 LD10.3 S1. S1.1 S2. S2.1 S3. S3.1 S4. S4.1

## Polygon pours and split planes (outlines as drawn)
GND on Top Layer "gatga" (solid, pour order 233): 2.577,91.882 216.481,91.882 216.481,-3.165 2.577,-3.165 2.577,1.809 -0.602,2.571 -3.794,4.788 -3.794,72.359 -1.307,74.846 -1.307,85.609 2.577,85.609
P25V0_1 on Top Layer "NONET_L01_P-001" (solid, pour order 168): 21.169,32.117 21.169,27.731 25.251,27.731 25.251,29.786 25.251,32.117
P26V0_SW on Top Layer "Top Layer-P26V0_SW" (solid, pour order 194): 121.677,21.598 122.168,22.09 125.71,22.09 129.024,25.404 129.024,26.355 119.931,26.355 119.737,26.161 119.737,18.198 121.677,18.198
P12V0_DIOT on Top Layer "NONET_L01_P-001" (solid, pour order 180): 189.052,2.19 189.052,-2.624 215.561,-2.624 215.561,0.943 194.05,0.943 192.803,2.19 189.052,2.19
NetC20_1 on Top Layer "NONET_L-01_P-001" (solid, remove dead copper, pour order 219): 188.927,89.443 199.927,89.443 203.927,85.443 203.927,74.943 204.927,73.943 204.927,55.433 199.927,55.433 199.927,81.943 198.611,83.259 194.104,83.259 193.434,82.59 189.28,82.59 188.427,83.443 188.427,88.943
NetC20_2 on Top Layer "NONET_L-01_P-001" (solid, remove dead copper, pour order 218): 188.427,82.443 193.927,82.443 193.927,83.259 198.588,83.259 199.927,81.92 199.927,55.446 194.927,55.446 194.927,75.443 193.427,76.943 189.427,76.943 187.927,78.443 187.927,81.943
NetC40_2 on Top Layer "T" (solid, pour order 208): 120.331,58.385 120.331,53.024 117.425,53.024 117.425,53.633 111.321,53.633 111.321,58.385
P25V0_0 on Top Layer "NONET_L01_P-001" (solid, pour order 205): 21.066,65.073 21.066,68.804 24.885,68.804 24.885,65.073 23.512,65.073
P12V0_SW on Top Layer "NONET_L01_P-001" (solid, pour order 210): 121.191,13.595 118.503,13.595 116.077,11.168 112.136,11.168 112.136,15.37 112.125,15.38 120.713,15.38 121.191,14.902
P25V0_0 on Top Layer "NONET_L01_P-001" (solid, pour order 174): 110.578,53.832 109.449,53.832 107.416,55.865 106.381,55.865 105.789,56.457 105.789,58.662 106.168,59.041 110.214,59.041 110.586,58.668
NetC147_2 on Top Layer "NONET_L01_P-001" (solid, pour order 187): 118.79,34.404 118.79,39.522 125.648,39.522 126.917,38.253 126.917,31.382 125.503,29.968 123.686,29.968 123.563,30.091 123.563,34.246 123.404,34.404 120.244,34.404
NetC39_2 on Top Layer "NONET_L01_P-001" (solid, pour order 184): 122.479,59.336 129.214,59.336 129.214,49.267 128.33,48.383 126.951,48.383 126.951,50.823 124.875,52.899 122.479,52.899
P26V0_SW on Top Layer "Top Layer-P26V0_SW 1" (solid, pour order 175): 125.847,26.093 128.874,26.093 129.111,26.33 129.018,26.422 129.018,29.265 131.775,32.021 131.775,38.406 130.389,39.792 130.389,44.517 130.397,44.517 130.397,45.891 133.658,49.152 133.658,57.787 130.397,57.787 130.397,49.213 127.434,46.25 127.434,44.548 127.434,37.872 128.25,37.056 128.25,31.513 126.815,30.078 126.815,27.061
NetC102_2 on Top Layer "NONET_L01_P-001" (solid, pour order 209): 117.241,40.303 117.241,34.404 112.297,34.404 112.297,40.303
STRIP1 on Top Layer "esd1" (solid, pour order 237): -2.752,1.525 4.373,1.525 4.373,-3 36.998,-3 36.998,-4.5 -2.752,-4.5
STRIP2 on Top Layer "esd1" (solid, pour order 239): 79.931,-4.55 96.998,-4.55 96.998,-3.281 41.998,-3.281 41.998,-4.55
STRIP3 on Top Layer "STRIP3_L01_P238" (solid, pour order 238): 214.531,-4.55 214.548,-4.55 215.788,-3.31 116.998,-3.31 116.998,-4.55
P12V0 on Top Layer "NONET_L-01_P-001" (solid, remove dead copper, pour order 222): 187.154,-2.557 174.05,-2.557 173.177,-1.684 173.177,8.443 172.427,9.193 172.427,77.693 170.677,79.443 166.427,79.443 164.677,81.193 163.427,81.193 162.677,81.943 162.677,85.193 163.177,85.693 175.917,85.693 175.917,2.453 178.318,0.052 187.154,0.052
N6V0 on Top Layer "NONET_L01_P-001" (solid, pour order 215): 125.432,2.004 125.432,3.831 124.922,4.341 124.922,5.723 125.385,6.186 125.385,7.973 121.963,7.973 121.963,1.368 123.451,1.368 124.087,2.004 124.34,2.004
GND on Top Layer "NONET_L-01_P-001" (solid, remove dead copper, pour order 221): 163.427,79.193 169.177,79.193 170.927,77.443 170.927,72.443 170.177,71.693 168.427,71.693 167.927,72.193 163.427,72.193 163.227,72.393 163.227,78.993
P5V5 on Top Layer "NONET_L-01_P-001" (solid, remove dead copper, pour order 227): 163.116,78.882 163.116,78.504 163.116,72.132 162.177,71.193 158.427,71.193 157.177,69.943 157.177,68.443 155.927,67.193 153.427,67.193 152.427,68.193 152.427,72.193 152.927,72.693 155.177,72.693 156.427,73.943 156.427,75.443 156.677,75.443 156.927,75.693 157.427,75.693 157.427,77.193 157.941,77.707 160.191,77.707 161.354,78.87
P12V0F on Top Layer "NONET_L01_P-001" (solid, pour order 178): 151.39,80.217 151.39,76.338 156.7,76.338 156.7,80.217
P12V0F on Top Layer "NONET_L01_P-001" (solid, pour order 179): 169.241,70.087 172.427,70.087 172.427,72.439 169.241,72.439
P12V0 on Top Layer "NONET_L01_P-001" (solid, pour order 181): 188.115,2.19 185.227,-0.699 185.227,-2.557 189.052,-2.557 189.052,2.19
P5V5A on Top Layer "NONET_L-01_P-001" (solid, remove dead copper, pour order 231): 129.723,77.466 129.723,69.981 126.977,67.234 126.977,63.806 127.262,63.521 130.005,63.521 130.774,64.29 130.774,71.88 133.701,74.807 133.701,77.683 133.192,78.193 130.45,78.193
P12V0_SW on Top Layer "NONET_L-01_P-001" (solid, remove dead copper, pour order 223): 163.677,53.693 163.677,55.693 165.177,57.193 165.177,60.443 165.427,60.693 167.677,60.693 168.427,61.443 171.677,61.443 171.927,61.193 171.927,58.193 171.677,57.943 166.927,53.193 164.177,53.193
NetC7A_2 on Top Layer "NONET_L01_P-001" (solid, pour order 188): 52.117,65.127 52.117,63.508 50.111,63.508 49.127,62.523 49.127,62.489 45.06,62.489 45.06,65.15
NetC4A_2 on Top Layer "NONET_L01_P-001" (solid, pour order 189): 73.787,65.013 73.787,63.397 71.028,63.397 70.044,62.413 70.044,62.378 66.644,62.378 66.644,65.037
P12V0 on Top Layer "NONET_L01_P-001" (solid, pour order 196): 174.116,19.533 167.451,19.533 167.451,13.743 174.116,13.743
NetC7B_2 on Top Layer "NONET_L01_P-001" (solid, pour order 197): 52.219,28.954 50.703,28.954 49.783,28.035 44.23,28.035 44.23,26.613 44.548,26.295 45.664,26.295 45.992,25.966 45.992,25.464 49.387,25.464 49.387,26.518 50.137,27.268 52.219,27.268
NetC4B_2 on Top Layer "NONET_L01_P-001" (solid, pour order 201): 66.5,28.045 66.5,26.128 67.25,25.378 69.942,25.378 71.012,26.448 73.361,26.448 73.754,26.841 73.754,28.045
P5V5A on Top Layer "NONET_L-01_P-001" (solid, remove dead copper, pour order 232): 138.761,70.574 139.055,70.868 144.626,70.868 145.177,71.419 145.177,74.116 145.665,74.604 147.843,74.604 148.345,75.106 150.552,75.106 150.937,74.721 150.937,68.078 150.277,67.418 147.397,67.418 145.937,68.879 140.846,68.879 140.488,68.521 140.488,65.324 140.395,65.231 138.761,65.231
P12V0_SW on Top Layer "NONET_L-01_P-001" (solid, pour order 220): 160.6,86.943 160.6,80.495 150.659,80.495 148.853,82.301 148.853,85.385 150.411,86.943
GND on Bottom Layer "BAL_BOT" (solid, pour order 230): 1.776,92.151 216.427,92.151 216.427,-2.757 5.487,-2.757 3.694,-0.964 3.694,1.805 -1.124,1.805 -0.779,82.994 1.776,85.549
P5V0A on Bottom Layer "NONET_L-01_P-001" (solid, remove dead copper, pour order 185): 115.927,24.593 116.427,24.093 117.677,24.093 118.177,24.593 118.177,63.093 117.677,63.593 116.677,63.593 116.427,63.343 116.427,62.093 116.677,62.093 117.177,61.593 117.177,59.093 115.927,57.843 115.927,26.093
P3V3 on Bottom Layer "NONET_L01_P-001" (solid, pour order 198): 193.127,73.143 180.827,85.443 149.227,85.443 142.641,78.857 142.641,9.345 156.09,9.345 157.14,10.395 162.124,10.395 164.254,12.525 164.254,51.885 169.336,51.885 171.963,49.258 178.047,49.258 178.731,48.575 178.35,48.194 178.35,47.289 178.586,47.289 180.293,45.581 191.471,45.581 193.127,47.237 193.127,73.043
P12V0F on Bottom Layer "NONET_L-01_P-001" (solid, pour order 193): 151.927,80.193 156.427,80.193 156.677,79.943 156.677,77.193 157.427,76.443 169.427,76.443 172.177,73.693 172.177,69.443 170.302,67.568 165.552,67.568 158.927,74.193 156.427,74.193 154.427,76.193 151.677,76.193 151.427,76.443 151.427,79.693
P3V3A on Bottom Layer "NONET_L01_P-001" (solid, pour order 177): 122.264,79.608 122.264,70.829 130.768,70.829 130.768,79.608
P12V0_SW on Bottom Layer "Bottom Layer-P12V0_SW" (solid, pour order 191): 156.927,77.693 157.427,77.193 157.427,76.61 169.76,76.61 172.427,73.943 172.427,61.443 169.927,61.443 169.927,61.059 167.855,58.987 165.464,58.987 160.074,53.598 160.074,11.421 164.677,11.421 164.677,50.443 174.177,59.943 174.177,75.193 167.927,81.443 157.177,81.443 156.927,81.193
STRIP1 on Bottom Layer "esd1" (solid, pour order 234): -2.752,0.939 4.373,0.939 4.373,-3 36.998,-3 36.998,-4.5 -2.752,-4.5
STRIP2 on Bottom Layer "esd1" (solid, pour order 241): 79.931,-4.55 96.998,-4.55 96.998,-3.281 41.998,-3.281 41.998,-4.55
STRIP3 on Bottom Layer "STRIP3_L04_P235" (solid, pour order 235): 214.531,-4.55 214.548,-4.55 215.788,-3.31 116.998,-3.31 116.998,-4.55
GND on Int2 (PWR) "BAL_TOP" (solid, pour order 216): 1.277,91.882 215.181,91.882 215.181,-2.982 1.277,-2.982 1.277,1.809 0.226,2.038 -5.094,5.558 -5.094,72.359 -2.607,74.846 -2.607,85.609 1.277,85.609
P12V0_SW on Int2 (PWR) "NONET_L01_P-001" (solid, pour order 192): 111.859,12.392 112.036,12.215 118.652,12.215 119.165,11.702 164.731,11.702 164.731,13.584 111.926,13.584 111.859,13.518
P5V0A on Int2 (PWR) "NONET_L-01_P-001" (solid, remove dead copper, pour order 203): 143.177,66.693 143.177,64.443 140.927,62.193 133.677,62.193 119.677,62.193 118.677,61.193 116.427,61.193 115.677,61.943 115.677,63.443 116.427,64.193 132.677,64.193 135.427,66.943 142.927,66.943
P5V5A on Int2 (PWR) "NONET_L-01_P-001" (solid, remove dead copper, pour order 214): 129.723,70.233 129.983,70.493 140.444,70.493 140.802,70.135 140.802,68.897 140.291,68.386 130.727,68.386 130.312,67.971 129.241,67.971 129.027,68.185 129.027,69.57 129.691,70.233
GND on Int1 (GND) "BAL_TOP" (solid, pour order 240): 1.048,91.793 214.952,91.793 214.952,-2.699 1.048,-2.699 1.048,2.276 -0.573,2.571 -5.323,5.75 -5.323,72.826 -2.836,75.313 -2.836,86.076 1.048,86.076
STRIP3 on Int1 (GND) "NONET_L01_P-001" (solid, pour order 200): 36.202,-5.482 36.202,-1.56 37.073,-0.689 38.334,-0.689 39.202,-1.557 39.202,-2.407 39.702,-2.907 117.974,-2.907 118.474,-3.407 118.474,-4.735 117.727,-5.482

## Keep-outs
Keep-Out Layer:
  drawing of 6848 lines, arcs and shapes, not listed

## Other copper
Top Layer:
  rectangle net GND: 167.597,72.117 168.027,72.608
  rectangle net GND: 164.239,72.243 164.887,72.815
  rectangle net GND: 91.102,64.526 91.961,64.736
  rectangle net GND: 144.729,19.743 144.827,20.184
  rectangle net GND: 141.55,12.375 141.978,12.494
  rectangle net GND: 117.595,36.273 118.115,36.527
  rectangle net GND: 116.931,30.175 117.494,30.468
  rectangle net GND: 91.102,27.526 91.684,27.752
  rectangle net GND: 73.81,58.949 75.71,59.587
  rectangle net GND: 73.294,56.288 75.878,59.463
  rectangle net GND: 73.81,56.193 75.71,59.468
  rectangle net GND: 74.36,58.79 75.102,62.183
  rectangle net GND: 13.15,72.384 13.475,72.475
  rectangle net GND: 73.81,21.979 75.71,22.587
  rectangle net GND: 74.36,21.82 75.102,25.212
  rectangle net GND: 73.294,19.318 75.878,22.462
  rectangle net GND: 12.924,35.138 13.336,35.326
  rectangle net P5V0A: 132.215,62.338 133.701,65.54
  rectangle net NetC40_2: 119.712,54.935 120.204,55.187
  rectangle net NetC39_2: 124.265,53.026 124.403,53.503
  rectangle net NetC147_2: 120.777,34.56 121.085,34.941
  rectangle net NetC147_2: 118.917,36.3 119.565,36.539
  rectangle net NetC102_2: 116.068,36.252 117.064,36.604
  pour cut-out: 20.884,27.57 20.884,26.914 24.612,26.914 24.612,27.575
  pour cut-out: 20.941,65.073 20.941,64.117 24.885,64.117 24.885,65.073
Bottom Layer:
  rectangle net P5V5A: 129.347,68.386 130.513,69.943

## Silkscreen, mask and mechanical layers (free items; w line width, h text height)
Top Overlay:
  drawing of 1237 lines, arcs and shapes, not listed
  text "P3V3A" at 122.423,85.697 h1 r90
  text "P3V3MP" at 125.773,85.697 h1 r90
  text "P3V3" at 128.573,85.697 h1 r90
  text "P5V5" at 133.682,85.697 h1 r90
  text "P5V0A" at 131.173,85.447 h1 r90
  text "P12V0" at 136.322,85.447 h1 r90
  text "P12V0A" at 139.154,84.947 h1 r90
  text "GND" at 143.035,82.633 h1 r90
  text "G" at 179.656,58.697 h1
  text "DE" at 178.987,56.197 h1
  text "EEM 1" at 168.156,55.193 h1.52
  text "Tx" at 178.806,53.447 h1
  text "Rx" at 178.733,51.008 h1
  text "V" at 179.181,48.297 h1
  text "UART" at 179.495,46.233 h1
  text "UART" at 145.365,36.089 h1
  text "Rx" at 144.531,33.622 h1
  text "Tx" at 144.156,30.947 h1
  text "SiLPA HE v1.0" at 180.75,17.975 h2
  text "ISE2025" at 192.081,15.389 h1
Bottom Overlay:
  drawing of 1237 lines, arcs and shapes, not listed
  text "SiLPA HE v1.0" at 134.268,6.178 h2
  text "ISE2025" at 122.581,4.65 h1
Top Solder:
  rectangle: -0.202,-4.948 1.975,-3.175
  rectangle: -2.379,-4.948 -0.202,-3.15
  rectangle: 1.448,-4.948 216.417,-3.15
Bottom Solder:
  rectangle: 1.367,-4.948 216.417,-3.15
  rectangle: -0.202,-4.948 1.975,-3.175
  rectangle: -2.379,-4.948 -0.202,-3.15
  pour cut-out: 44.782,20.498 cw(c44.689,19.742) 44.782,18.985 cw(c44.788,19.742)
  pour cut-out: 15.243,34.289 cw(c15.149,33.532) 15.243,32.775 cw(c15.249,33.532)
  pour cut-out: 15.686,35.116 cw(c15.593,34.359) 15.686,33.602 cw(c15.692,34.359)
  pour cut-out: 20.072,34.1 cw(c19.979,33.343) 20.072,32.586 cw(c20.078,33.343)
  pour cut-out: 24.669,34.417 cw(c24.575,33.66) 24.669,32.903 cw(c24.675,33.66)
  pour cut-out: 26.793,33.861 cw(c26.7,33.104) 26.793,32.347 cw(c26.799,33.104)
  pour cut-out: 36.002,33.452 cw(c35.909,32.695) 36.002,31.938 cw(c36.008,32.695)
  pour cut-out: 43.585,34.686 cw(c43.492,33.929) 43.585,33.172 cw(c43.591,33.929)
  pour cut-out: 33.958,19.667 cw(c33.865,18.91) 33.958,18.153 cw(c33.964,18.91)
  pour cut-out: 32.485,20.71 cw(c32.392,19.953) 32.485,19.196 cw(c32.491,19.953)
  pour cut-out: 11.686,19.672 cw(c11.593,18.915) 11.686,18.158 cw(c11.693,18.915)
  pour cut-out: 13.55,20.585 cw(c13.456,19.828) 13.55,19.071 cw(c13.556,19.828)
  pour cut-out: 16.285,20.35 cw(c16.192,19.593) 16.285,18.836 cw(c16.291,19.593)
  pour cut-out: 18.414,20.246 cw(c18.321,19.489) 18.414,18.732 cw(c18.42,19.489)
  pour cut-out: 22.532,21.134 cw(c22.439,20.377) 22.532,19.62 cw(c22.538,20.377)
  pour cut-out: 22.64,30.1 22.64,29.534 ccw(c23.39,29.534) 23.39,28.784 23.452,28.784 ccw(c23.452,29.478) 24.146,29.478 24.146,30.501 ccw(c23.39,30.501) 23.39,31.258 ccw(c23.39,30.515) 22.647,30.515 22.647,30.094
Mechanical 1:
  drawing of 266 lines, arcs and shapes, not listed
Mechanical 2:
  lines w0.1: -6.117,-19.795 -6.117,102.887 ; 27.927,97.943 27.927,2.443 107.677,2.443 ; 99.677,2.443 99.677,99.193
Mechanical3:
  lines w0.1: -8.617,-19.795 -8.617,105.237 ; -6.117,-19.795 -6.117,105.51
SHIELD:
  lines w1: 6.527,-1.157 6.527,-0.657
Mechanical6:
  lines w3: -0.823,54.943 4.427,54.943 6.927,52.443 12.927,52.443 ; -0.823,71.693 7.427,71.693 11.177,75.443 26.927,75.443 ; -0.823,83.943 3.427,83.943 ; 12.177,82.943 40.177,82.943 ; 13.427,52.443 24.927,52.443 ; 32.927,52.443 66.427,52.443 ; 32.927,75.443 46.427,75.443 ; 43.427,75.443 66.427,75.443 ; 47.427,52.443 47.427,57.443 ; 47.427,70.443 47.427,74.443 ; 48.177,82.943 78.427,82.943 ; 74.427,52.443 99.427,52.443 101.927,54.943 101.927,59.443 ; 74.427,75.443 98.427,75.443 101.177,72.693 101.177,68.693 101.177,67.997 ; 86.427,82.943 101.927,82.943 108.677,76.193 108.677,66.193
Mechanical 13:
  lines w0.01: -6.923,-6.341 -6.923,75.367

## Text inside footprints (layer, text, board x,y; h text height)
J7: Top Overlay "1" at 201.722,64.13 h1.2 r270; Mechanical 14 "1" at 201.722,64.13 h1.2 r270
J9: Top Overlay "30" at 173.078,15.016 h1.02 r270; Mechanical 14 "30" at 173.078,15.016 h1.02 r270
J11: Top Overlay "1" at 183.312,69.19 h1; Mechanical 14 "1" at 183.312,69.19 h1
J12: Top Overlay "6" at 194.416,8.593 h1 r90; Top Overlay "5" at 194.416,6.593 h1 r90; Top Overlay "4" at 194.416,4.593 h1 r90; Top Overlay "3" at 194.416,2.593 h1 r90; Top Overlay "2" at 194.416,0.593 h1 r90; Top Overlay "1" at 194.416,-1.407 h1 r90; Top Overlay "L" at 199.466,-3.257 h1 r90; Top Overlay "K" at 200.866,-3.257 h1 r90; Top Overlay "J" at 202.266,-3.257 h1 r90; Top Overlay "I" at 203.666,-3.007 h1 r90; Top Overlay "H" at 205.066,-3.257 h1 r90; Top Overlay "G" at 206.466,-3.257 h1 r90; Top Overlay "F" at 207.866,-3.257 h1 r90; Top Overlay "E" at 209.266,-3.257 h1 r90; Top Overlay "D" at 210.666,-3.257 h1 r90; Drill Drawing "Diam. 0.5mm +/-0.05" at 215.116,12.943 h1 r180; Drill Drawing "PRESS-FIT TECHNOLOGY" at 215.116,11.443 h1 r180; Mechanical 14 "6" at 194.416,8.593 h1 r90; Mechanical 14 "5" at 194.416,6.593 h1 r90; Mechanical 14 "4" at 194.416,4.593 h1 r90; Mechanical 14 "3" at 194.416,2.593 h1 r90; Mechanical 14 "2" at 194.416,0.593 h1 r90; Mechanical 14 "1" at 194.416,-1.407 h1 r90; Mechanical 14 "L" at 199.466,-3.257 h1 r90; Mechanical 14 "K" at 200.866,-3.257 h1 r90; Mechanical 14 "J" at 202.266,-3.257 h1 r90; Mechanical 14 "I" at 203.666,-3.007 h1 r90; Mechanical 14 "H" at 205.066,-3.257 h1 r90; Mechanical 14 "G" at 206.466,-3.257 h1 r90; Mechanical 14 "F" at 207.866,-3.257 h1 r90; Mechanical 14 "E" at 209.266,-3.257 h1 r90; Mechanical 14 "D" at 210.666,-3.257 h1 r90; Mechanical 14 "C" at 212.066,-4.257 h1 r90; Mechanical 14 "B" at 213.466,-4.257 h1 r90; Mechanical 14 "A" at 214.866,-4.257 h1 r90; Mechanical 8 "Edge of Daugher Card" at 217.216,0.718 h0.5 r90; Mechanical 8 "Top Surface of Mother Board" at 228.716,-0.432 h0.5 r90